# Altium PCB Proyecto_Multicapa_PCB.PcbDoc (part 2 of 2)
Units mil, origin at the board's own origin, x right, y up, seen from the top; angles counter-clockwise.
Board outline 2000 x 2600 mil, 6 copper layers (L1, L2 (GND), L3, L4, L5 (PWR), L6), stack 61.067 mil thick; 106 components, 104 nets, 402 pads, 132 vias.
Unrouted connection lines stored in the file: 69.
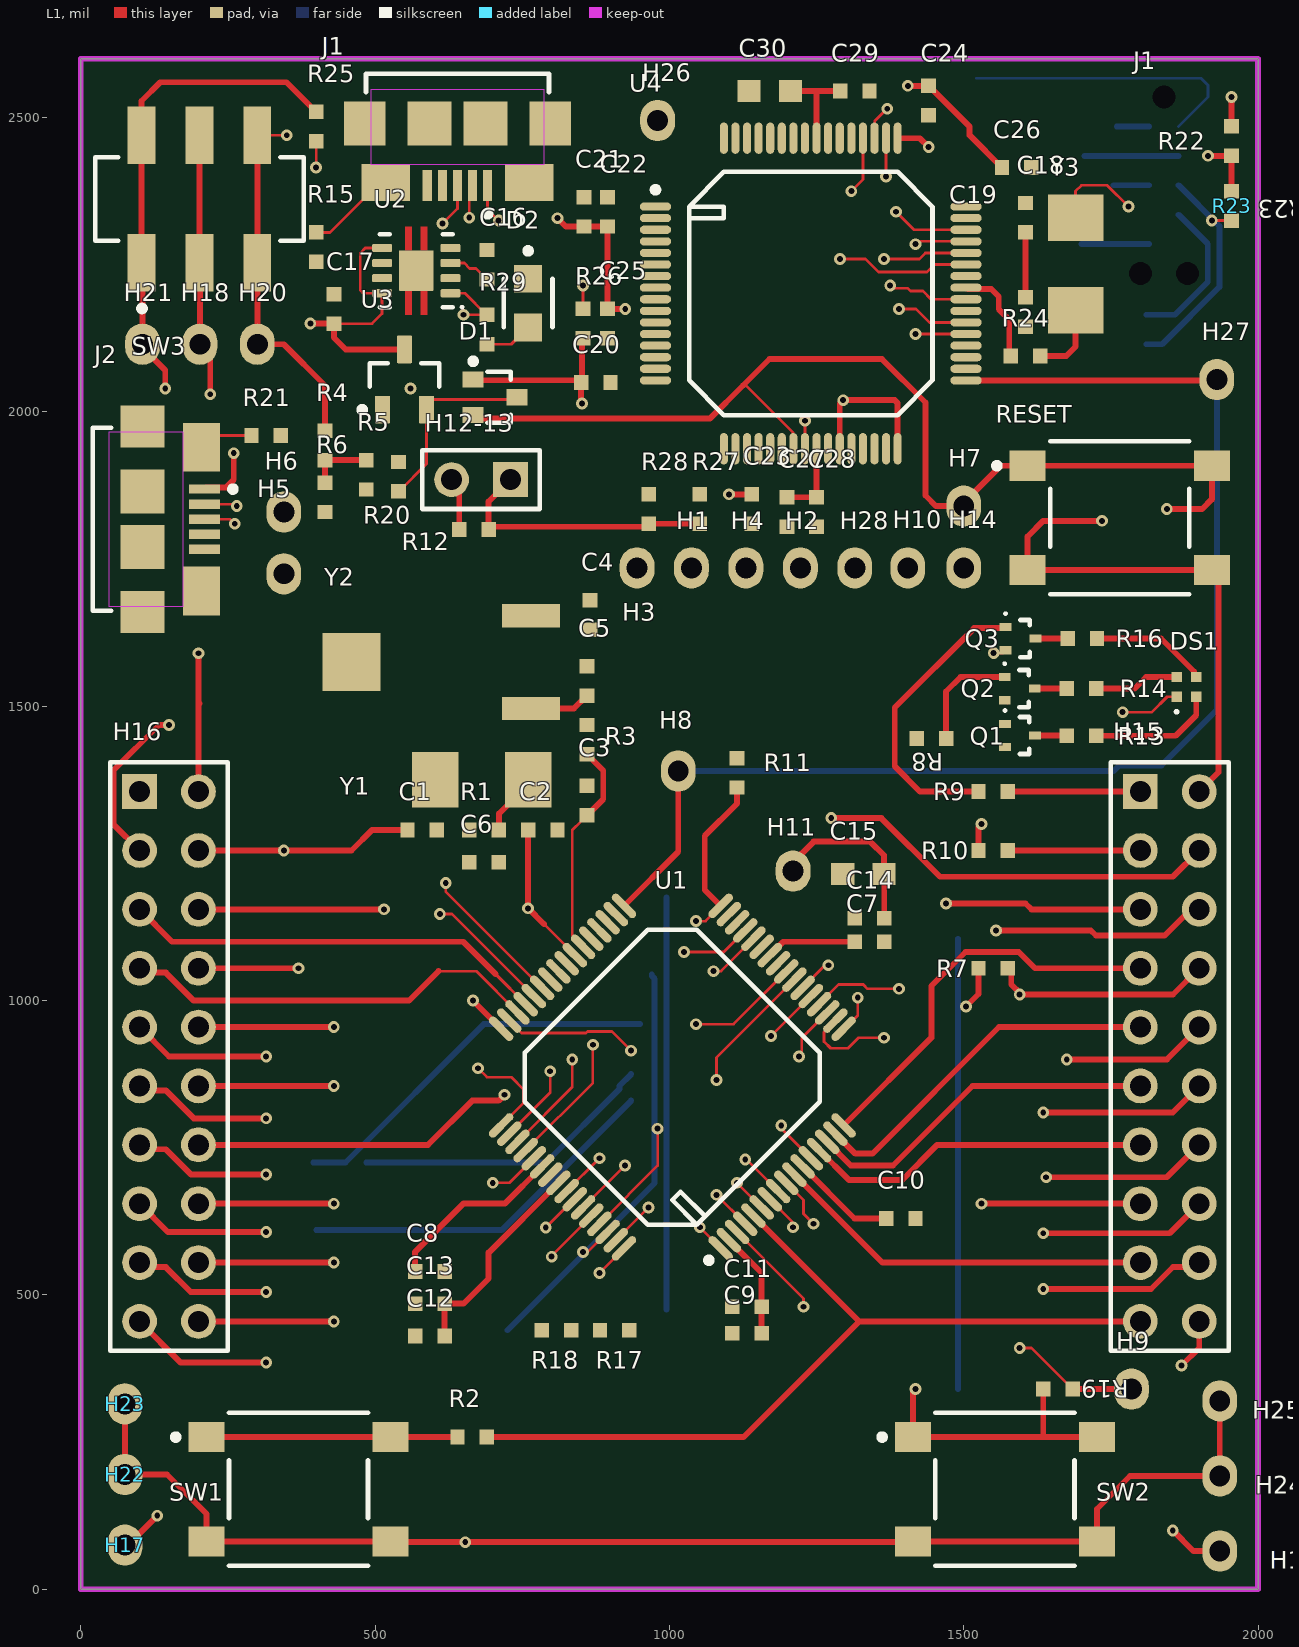
[diagram p0: L1 view]

## Via types
v1: diameter 20, hole 10, L1 to L3, 53 vias
v2: diameter 20, hole 10, L1 to L4, 49 vias
v3: diameter 20, hole 10, L3 to L6, 10 vias
v4: diameter 20, hole 10, L1 to L2 (GND), 8 vias
v5: diameter 20, hole 10, L4 to L6, 7 vias
v6: diameter 20, hole 10, L3 to L4, 3 vias
v7: diameter 20, hole 10, L1 to L6, 2 vias

## Nets (pads, with @x,y where several pads share a name; then routed paths per layer and width w, separated by ;. In a path a pad name is that pad's centre, name@x,y a point inside that pad or via, vN(x,y) a via of type N, cw(c..) or ccw(c..) an arc to the next point about the centre after c; other vN are vias at no path point) (continued)
+USB_VBUS: H20.1 J1.1@691.18,2384.68 R4.2 SW3.3 SW3.6 | length 1154.7
  L1 w4.66: SW3.6 v1(350,2470) ; J1.1@691.18,2384.68 691.18,2343.82 v1(710,2325)
  L1 w10: SW3.6 SW3.3 H20.1 345,2115 415,2045 R4.2
  L3 w10: v1(350,2470) 400,2520 515,2520 v1(710,2325)
+VBUS: C17.1 DS1.1 H16.11 H17.1 H18.1 SW3.2 SW3.5 U2.5 U2.8 U3.3 | length 6586.4
  L1 w4.66: C17.1 495,2150 511.93,2166.93 U2.8 480,2201.61 475,2206.61 475,2270.12 483.27,2278.39 U2.5 ; v1(1770,1490) 1819.47,1490 1845.69,1516.22 DS1.1
  L1 w10: H17.1 80,75 v1(130,125) ; H16.11 200,1506.57 ; v2(200,1590) 200,1506.57 ; 201.57,1505 200,1506.57 ; SW3.5 SW3.2 202.5,2252.54 H18.1 198.8,2111.3 220,2090.09 v2(220,2030) ; v2(390,2150) C17.1 430,2126.3 450.11,2106.18 U3.3
  L3 w10: v1(130,125) 1705,125 1715,135 1715,1435 v1(1770,1490)
  L4 w10: v1(130,125) 160,155 160,320 83.53,396.47 75.76,396.47 41.47,430.76 41.47,1431.47 v2(200,1590) 200,2021.2 208.8,2030 v2(220,2030) 303.24,2030 398.24,2125 398.24,2148.24 400,2150
DEBUG_PC0/TCK/SWCLK: H3.1 U1.52 | length 1067.2
  L1 w4.66: U1.52 870,860.27 v2(870,925)
  L4 w10: v2(870,925) 870,1654.53 945,1729.53 H3.1
DEBUG_PC1/TMS/SWDIO: H1.1 U1.51 | length 1236.3
  L1 w4.66: U1.51 835,853.11 v2(835,900)
  L4 w10: v2(835,900) 835,1693.44 926.56,1785 992.97,1785 1037.5,1740.47 H1.1
DEBUG_PC2/TDI: H2.1 U1.50 | length 1260.8
  L1 w4.66: U1.50 797.48,843.43 v2(797.48,880)
  L4 w10: v2(797.48,880) 832.48,845 875,845 910,880 910,1030 1222.5,1342.5 H2.1
DEBUG_PC3/TDO/SWO: H4.1 U1.49 | length 1235.2
  L1 w4.66: v1(675,885) 690,870 731.3,870 752.05,849.25 752.05,825.84 U1.49
  L3 w10: v1(675,885) 641.5,918.5 641.5,1136.5 1130,1625 H4.1
GND: C1.1 C2.1 C18.1 C19.1 D2.1 H15.11 H16.12 H22.1 H23.1 H24.1 H25.1 J1.2@1815.04,2435 J1.5 J1.9@1865.04,2435 J2.5 Q1.2 Q2.2 Q3.2 R6.1 R15.1 R21.1 RESET.3 RESET.4 SW1.3 SW1.4 SW2.3 SW2.4 U1.3 U1.12 U1.27 U1.39 U1.55 U2.4 U2.9 U3.1 U4.3 U4.12 U4.27 U4.32 U4.34 U4.35 U4.39 U4.55 | length 4703.4
  L1 w4.66: 786.76,1130 U1.39 ; U1.3 1227.88,494.01 v4(1227.88,480) ; v4(1190,787.88) 1190,782.44 U1.12 ; v4(1550.86,1590.69) 1566.38,1590.69 Q3.2 ; Q2.2 Q2.2@1574.19,1505.64
  L1 w10: H23.1 H22.1 146.57,195 213.5,128.07 SW1.3 SW1.4 527.91,80 v4(653.11,80) 1412.09,80 SW2.3 SW2.4 1726.5,136.5 1782.5,192.5 H24.1 H25.1 ; H16.12 v4(345,1255) 460,1255 495,1290 C1.1 ; R6.1 R6.1@417.6,1827.4 ; C2.1 v4(760,1156.76) 786.76,1130 ; U4.27 1289.37,2014.14 v4(1295.23,2020) 1382.8,2020 1387.8,2015 U4.32 ; C19.1 C18.1 ; v4(1735,1815) 1635,1815 1608.5,1788.5 RESET.3 RESET.4 1932.86,1720.06 1932.86,1387.86 H15.11
  L6 w10: 1700,2285 J1.5@1815.04,2285 ; 1705,2435 1815.04,2435 J1.9@1865.04,2435
NetC1_0: R1.2 Y1.1 | length 105.7
  L1 w10: R1.2 710.47,1290.47 710.47,1317.6 760,1367.13 Y1.1
NetC2_0: U1.40 Y1.2
NetC3_1: C3.1 D1.2 H7.1 H15.15 R3.1 RESET.1 RESET.2 U1.38 U4.23 | length 3429.5
  L1 w4.66: U1.38 853.28,1091.98 835,1110.26 835,1289.61 849.73,1304.34 849.73,1305.13 859.61,1315 C3.1 C3.1@860.39,1315 ; 1125,2045 1130.25,2045 1210.16,1965.09 1210.16,1937.91 U4.23
  L1 w10: D1.2 672.35,1989.14 1069.14,1989.14 1125,2045 1170,2090 1360.88,2090 1435,2015.88 1435,1858 1453,1840 H7.1 ; R3.1 860.39,1418.22 887.6,1391.02 887.6,1342.2 C3.1@860.39,1315 ; H7.1@1500,1845.47 1563.11,1908.58 RESET.1 RESET.2 1921.5,1851.5 1905,1835 v1(1845,1835) ; v1(1675,900) 1845,900 H15.15
  L3 w10: v1(1675,900) 1675,1665 v1(1845,1835)
NetC7_0: 
NetC16_1: C16.1 U2.3 | length 73.4
  L1 w4.66: U2.3 651.79,2252.8 660.75,2243.84 671.16,2243.84 C16.1
NetC18_0: R24.2 Y3.1 | length 128.2
  L1 w10: R24.2 1674.14,2095 1690,2110.86 Y3.1
NetC19_0: U4.40 Y3.2 | length 929.6
  L1 w4.66: v2(1375,2215) 1380,2210 1405,2210 1409.45,2205.55 1430.49,2205.55 1444.66,2191.38 U4.40 ; Y3.2 1690,2375 1700,2385 1743.86,2385 v2(1780,2348.86)
  L4 w10: v2(1375,2215) 1375,2105 1400,2080 1511.14,2080 v2(1780,2348.86)
NetC20_1: C20.1 D1.1 J1.8@1865.04,2385 R26.1 U4.38 | length 1838
  L1 w4.66: v1(1390,2175) 1418.69,2175 1441.68,2152.01 U4.38
  L1 w10: D1.1 667.72,2053.78 846.22,2053.78 C20.1 ; v1(851.64,2014.14) 850,2015.78 C20.1 ; R26.1 851.64,2123.36 851.64,2051.64 C20.1
  L3 w10: v1(851.64,2014.14) 1004.14,2014.14 1165,2175 v1(1390,2175) 1750,2175 v3(1810,2115)
  L6 w10: v3(1810,2115) 1837.09,2115 1934.51,2212.42 1934.51,2315.53 J1.8@1865.04,2385
NetC21_1: C21.1 C22.1 C23.1 C24.1 C25.1 C26.1 | length 1601.7
  L1 w10: v2(810,2329.17) 824.17,2315 C21.1 C22.1 C25.1 924.67,2175 v2(925,2174.67) ; v2(1101.04,1860) C23.1 ; v2(1405,2553.98) C24.1 1440.39,2553.98 1510,2484.37 1510,2470 C26.1
  L4 w10: v2(810,2329.17) 1180.2,2329.17 v2(1405,2553.98) ; v2(925,2174.67) 925,2036.04 v2(1101.04,1860)
NetC22_0: 
NetD1_3: D1.3 R20.1 U3.2 | length 325.4
  L1 w4.66: R20.1 540.39,1865 587.4,1912.01 U3.2 587.4,2010.64 597.87,2021.11 737.41,2021.11 D1.3
NetD2_2: D2.2 R29.1 | length 81.9
  L1 w4.66: R29.1 731.34,2115 D2.2
NetDS1_2: DS1.2 R14.2 | length 144.7
  L1 w10: R14.2 1790,1530 1809.68,1549.68 DS1.2
NetDS1_3: DS1.3 R16.2 | length 198.8
  L1 w10: R16.2 1835.15,1615 1891.14,1559.01 1891.14,1553.54 DS1.3
NetDS1_4: DS1.4 R13.2 | length 215.7
  L1 w10: R13.2 1860,1450 1895,1485 DS1.4
NetH5_1: H5.1 J1.3@640,2384.68 U1.44 | length 1687.1
  L1 w4.66: v7(610,1147) 630.57,1147 U1.44 ; v2(614.64,2320) 640,2345.36 J1.3@640,2384.68
  L3 w10: H5.1 345,1730.47 560,1945.47 v2(560,2040)
  L4 w10: H5.1 345,1439.64 610,1174.64 v7(610,1147) ; v2(560,2040) 560,2265.36 v2(614.64,2320)
NetH6_1: H6.1 J1.2@665.59,2384.68 U1.43 | length 2462.2
  L1 w4.66: v7(620,1200) 620,1185.4 U1.43 ; v1@665,2335 v1(660,2330) 660,2379.09 J1.2@665.59,2384.68
  L3 w10: H6.1 345,1824.53 285.47,1765 240,1765 140,1865 140,1975 54.14,2060.86 54.14,2132.59 421.56,2500 490,2500 v1(660,2330)
  L4 w10: H6.1 345,1824.53 620,1549.53 v7(620,1200)
NetH8_1: H8.1 H27.1 U1.33 U4.33 | length 2210.9
  L1 w10: U1.33@924.43,1162.47 1015,1253.04 H8.1 ; U4.33 1928.58,2053.58 H27.1
  L6 w10: H8.1 1754.73,1390 1764.26,1399.53 1835.74,1399.53 1930,1493.79 H27.1
NetH9_1: H9.1 R11.1 R19.1 U1.32 | length 1893.2
  L1 w4.66: v1(1045,1135) 1061.21,1135 U1.32 ; v1(1595,410) 1615,410 R19.1
  L1 w10: U1.32@1085.57,1162.47 1060,1188.04 1060,1279.8 1115,1334.8 R11.1 ; R19.1 H9.1
  L3 w10: v3(995,1175) 1005,1175 v1(1045,1135) ; v3@1000,475 1065,410 v1(1595,410)
  L6 w10: v3(995,475) v3(995,1175)
NetH26_1: H26.1 U4.64
NetH28_1: H28.1 U4.24 | length 332.6
  L1 w4.66: U4.24 v1(1230.32,1985)
  L3 w10: v1(1230.32,1985) 1315,1900.32 H28.1
NetJ1_1: J1.1@1815.04,2485 R23.2 U4.51 | length 777.7
  L1 w4.66: U4.51 1348.89,2465.47 1348.89,2493.89 v1(1370,2515) ; v1(1921.5,2325) R23.2
  L3 w10: v1(1370,2515) 1730,2515 v3(1760,2485) 1760.75,2485 1920.75,2325 v1(1921.5,2325)
  L6 w10: v3(1760,2485) J1.1@1815.04,2485
NetJ1_3: J1.3@1815.04,2385 R22.2 U4.52 | length 1248.4
  L1 w4.66: v1(1309.06,2375) 1328.74,2394.68 U4.52
  L1 w10: R22.2 v1(1955,2535)
  L3 w10: v1(1309.06,2375) 1309.06,2376.3 1407.76,2475 1605,2475 1695,2385 v3(1754.73,2385) 1815,2385 1935.86,2264.14 1944.14,2264.14 1955,2275 v1(1955,2535)
  L6 w10: v3(1754.73,2385) J1.3@1815.04,2385
NetJ1_6: J1.6@517.95,2389.61 J1.7@762.05,2389.61 J1.8@797.48,2490.02 J1.9@482.52,2490.02 J1.10@592.76,2490.02 J1.11 R15.2 | length 153
  L1 w4.66: R15.2 423.5,2305 508.11,2389.61 J1.6@517.95,2389.61
NetJ1_7: J1.7@1865.04,2335 U4.49 | length 808.8
  L1 w10: U4.49 1425.39,2465 v1(1440.39,2450)
  L3 w10: v1(1440.39,2450) 1525,2450 v3(1810,2165)
  L6 w10: v3(1810,2165) 1858.8,2165 1914.51,2220.71 1914.51,2285.53 J1.7@1865.04,2335
NetJ1_10: J1.10@1865.04,2485 U4.50 | length 784.3
  L1 w4.66: v1(1368.11,2400) U4.50
  L4 w10: v1(1368.11,2400) 1504.16,2536.05 1504.16,2549.16 v5(1521.84,2566.84)
  L6 w4.66: v5(1521.84,2566.84) 1903.16,2566.84 1915,2555 1915,2534.96 J1.10@1865.04,2485
NetJ2_2: J2.2 U4.43 | length 1516.4
  L1 w4.66: J2.2 261.65,1843.35 v1(265,1840) ; v1(1290,2260) 1332.95,2260 1355.28,2237.67 1437.33,2237.67 1450.09,2250.43 U4.43
  L3 w10: v1(265,1840) 265,1875 665,2275 1275,2275 v1(1290,2260)
NetJ2_3: J2.3 U4.44 | length 1520.3
  L1 w4.66: J2.3 253.9,1817.76 v1(261.65,1810) ; v1(1364.53,2260) 1424.69,2260 1434.81,2270.12 U4.44
  L3 w10: v1(261.65,1810) 263.57,1811.91 272.27,1811.91 296.96,1836.6 296.96,1878.67 663.28,2245 1269.64,2245 1279.64,2235 1300.36,2235 1325.36,2260 v1(1364.53,2260)
NetJ2_6: J2.6 J2.7 J2.8 J2.9 J2.10 J2.11 R21.2 | length 93
  L1 w4.66: J2.7 225.61,1960 R21.2
NetQ1_1: Q1.1 R10.1 | length 226.2
  L1 w10: R10.1 1525,1295 v1(1530,1300)
  L3 w10: v1(1530,1300) 1530,1462.29 1540,1472.29 1540,1475
NetQ1_3: Q1.3 R13.1 | length 54.1
  L1 w10: Q1.3 1621.14,1450.16 1674.84,1450.16 R13.1
NetQ2_1: Q2.1 R8.1 | length 189.7
  L1 w10: R8.1 1470,1525 1494.68,1549.68 Q2.1
NetQ2_3: Q2.3 R14.1 | length 54.5
  L1 w10: Q2.3 R14.1
NetQ3_1: Q3.1 R9.1 | length 504.7
  L1 w10: R9.1 1425.86,1355 1382.8,1398.06 1382.8,1497.8 1517.68,1632.68 1569,1632.68 Q3.1
NetQ3_3: Q3.3 R16.1 | length 54.5
  L1 w10: Q3.3 R16.1
NetR1_1: R1.1 U1.41
NetR2_2: R2.2 SW1.1 SW1.2 | length 426.5
  L1 w10: SW1.1 SW1.2 R2.2
NetR4_1: R4.1 R5.1 R6.2 | length 108.2
  L1 w10: R6.2 R4.1 R5.1
NetR7_1: R7.1 R19.2 SW2.1 SW2.2 | length 1519.1
  L1 w10: v2(1418.11,340) 1413.5,335.39 SW2.1 1635,258.58 ; v2(1503.94,990) 1525,1011.06 R7.1 ; R19.2 1635,258.58 ; SW2.2 1635,258.58
  L4 w10: v2(1418.11,340) v5(1490,340) v5@1500,340 ; v5(1490,1105) 1490,1006.06 1503.94,992.13 v2(1503.94,990)
  L6 w10: v5(1490,340) v5(1490,1105)
NetR17_1: R17.1
NetR17_2: R17.2
NetR18_1: R18.1
NetR18_2: R18.2
NetR24_1: R24.1 U4.41 | length 171.3
  L1 w10: U4.41 1506.14,2208.86 1546.69,2208.86 1559.51,2196.04 1559.51,2174.67 1577.4,2156.78 1577.4,2097.6 R24.1
NetR25_2: R25.2 U4.46 | length 1226.3
  L1 w4.66: v1(399.61,2415) 400,2415.39 R25.2 ; v1(1385,2340) 1415.51,2309.49 U4.46
  L3 w10: v1(399.61,2415) 514.61,2300 1345,2300 v1(1385,2340)
NetU4_29: U4.29
NetU4_30: U4.30
NetU4_53: U4.53
PA0/U0RX_VCP_TXD: H10.1 U1.17 | length 828.8
  L1 w4.66: U1.17 1297.12,952.12 1320,975 v2(1320,1005)
  L4 w10: v2(1320,1005) 1320,1205 1405,1290 H10.1
PA0/U0RX_VCP_TXD: U4.17
PA1/U0TX_VCP_RXD: H14.1 U1.18 | length 1011.8
  L1 w4.66: U1.18 1282,965.39 1262.78,946.17 1262.78,930.24 1274.04,918.99 1303.14,918.99 1321.12,936.96 v2(1364.53,936.96)
  L4 w10: v2(1364.53,936.96) 1364.53,1179.53 1500,1315 H14.1
PA1/U0TX_VCP_RXD: U4.18
PA2: H15.20 U1.19 | length 1082
  L1 w4.66: v2(1220,905) 1225,910 1225,936.96 1225.07,936.96 U1.19
  L1 w10: v2(1870,380) 1900,410 H15.20
  L4 w4.66: 1655,415 1671.03,398.97 1851.03,398.97 v2(1870,380)
  L4 w10: v2(1220,905) 1610,515 1610,460 1655,415
PA3: H15.19 U1.20 | length 1081
  L1 w4.66: U1.20 1287.6,1027.33 1329.25,1027.33 1336.58,1020 v2(1390,1020)
  L1 w10: v2(1635,510) 1817.97,510 1855.47,547.5 1892.5,547.5 H15.19
  L4 w10: v2(1390,1020) 1390,1009.73 1675,724.73 1675,550 v2(1635,510)
PA4: H15.18 U1.21 | length 983.1
  L1 w4.66: v2(1172.44,940) U1.21
  L1 w10: v2(1635,604.76) 1849.76,604.76 H15.18
  L4 w10: v2(1172.44,940) 1299.76,940 v2(1635,604.76)
PA5: H16.8 U1.22 | length 1437.1
  L1 w4.66: U1.22 1264.6,1060 v2(1270,1060)
  L1 w10: H16.8 148.08,606.92 v2(315,606.92)
  L4 w10: v2(315,606.92) 396.92,606.92 v5(400,610) ; v5(935,830) 1000,830 1139.04,969.04 1179.04,969.04 v2(1270,1060)
  L6 w10: v5(400,610) 715,610 v5(935,830)
PA6: H16.9 U1.23 | length 1427.9
  L1 w4.66: v1(1080,865) 1080,903.24 U1.23
  L1 w10: H16.9 107.72,547.28 144.53,547.28 186.8,505 v1(315,505)
  L3 w10: v1(315,505) 368.28,558.28 368.28,628.63 464.64,725 v3(485,725) ; v3(935,875) 960,875 970,865 v1(1080,865)
  L6 w10: v3(485,725) 790.36,725 915,849.64 915,855 v3(935,875)
PA7: H16.10 U1.24 | length 1575.8
  L1 w4.66: v2(1045,960) 1108.92,960 U1.24
  L1 w10: H16.10 170,385 v1(315,385)
  L3 w10: v1(315,385) 315,469.64 290,494.64 290,620 v3(395,725)
  L4 w10: v5(950,960) v2(1045,960)
  L6 w10: v3(395,725) 449.64,725 684.64,960 v5(950,960)
PB0: H16.3 U1.45 | length 722.6
  L1 w4.66: 705,1044.73 U1.45
  L1 w10: H16.3 155,1100 649.73,1100 705,1044.73
PB1: H16.4 U1.46 | length 714.4
  L1 w4.66: 607.8,1050 671.89,1050 U1.46
  L1 w10: H16.4 107.5,1047.5 144.53,1047.5 192.03,1000 557.8,1000 607.8,1050
PB2: H15.12 U1.47 | length 1521
  L1 w4.66: U1.47 749.05,945 858.42,945 860.75,947.33 902.67,947.33 v2(935,915)
  L1 w10: v2(1275,1310) 1360,1310 1459.69,1210.31 1855.31,1210.31 H15.12
  L4 w10: v2(935,915) 1055,915 1275,1135 v2(1275,1310)
PB3: H15.3 U1.48 | length 1273.6
  L1 w10: v1(666.5,1000) 666.5,999.71 U1.48 ; v1(1470,1165) 1605,1165 1615,1155 H15.3
  L3 w10: v1(666.5,1000) 1274.92,1000 1344.64,1069.73 1374.73,1069.73 v1(1470,1165)
PB4: H16.7 U1.58 | length 817.4
  L1 w4.66: v1(790,614.54) 838.06,662.6 U1.58
  L1 w10: H16.7 107.5,747.5 144.53,747.5 187.67,704.36 v2(315,704.36)
  L3 w10: v6(684.14,629.14) 698.74,614.54 v1(790,614.54)
  L4 w10: v2(315,704.36) 319.36,700 613.28,700 v6(684.14,629.14)
PB5: H16.2 U1.57 | length 1447.2
  L1 w4.66: U1.57 v2(881.12,732.2)
  L1 w10: H16.2 55.47,1299.53 55.47,1390.74 132.95,1468.22 v1(150,1468.22)
  L3 w10: v1(150,1468.22) 195.45,1422.78 215,1422.78 338.21,1299.56 338.21,1211.43 479.64,1070 v6(530,1070)
  L4 w10: v6(530,1070) 543.31,1070 v2(881.12,732.2)
PB6: H15.17 U1.1 | length 1027.3
  L1 w4.66: v1@1051.67,614.54 U1.1
  L1 w10: v1@1051.67,614.54 v1(1051.67,615) ; v1(1640,700) 1845,700 H15.17
  L3 w10: v1(1051.67,615) 1136.67,530 1470,530 v1(1640,700)
PB7: H15.16 U1.4 | length 1040.6
  L1 w4.66: v1(1080,670) U1.4@1128.88,621.12
  L1 w10: U1.4 U1.4@1128.88,621.12 ; v1(1635,810) 1855,810 H15.16
  L3 w10: v1(1080,670) 1170,580 1300,580 1530,810 v1(1635,810)
PC4: H15.4 U1.16 | length 686.8
  L1 w10: U1.16@1297.47,789.43 1445,936.96 1445,1024.64 1502.95,1082.6 1593.42,1082.6 1621.02,1055 H15.4
PC5: H15.5 U1.15 | length 621.1
  L1 w10: U1.15 1315.95,740 1345,740 1560,955 H15.5
PC6: H15.6 U1.14 | length 604.4
  L1 w10: U1.14 1308.11,720 1380,720 1515,855 H15.6
PC7: H15.7 U1.13 | length 591.9
  L1 w10: U1.13 1305.27,695 1395,695 1455,755 H15.7
PD0: H16.13 U1.61 | length 1153.2
  L1 w4.66: U1.61 980,719.73 v2(980,782.44)
  L1 w10: H16.13 v2(515,1155)
  L4 w10: v2(515,1155) 772.48,897.52 772.48,869.64 859.69,782.44 v2(980,782.44)
PD1: H16.14 U1.62 | length 908.6
  L1 w4.66: v2(853.28,573.11) 861.22,573.11 U1.62
  L1 w10: H16.14 v2(370,1055)
  L4 w10: v2(370,1055) 371.39,1055 v2(853.28,573.11)
PD2: H16.15 U1.63 | length 988.1
  L1 w4.66: U1.63 v1(964.63,648.68) v1@965,648.68
  L1 w10: H16.15 v1(430,955)
  L3 w10: v1(430,955) 560.78,824.22 560.78,794.31 706.4,648.68 v1(964.63,648.68)
PD3: H16.16 U1.64 | length 886.4
  L1 w4.66: v1(881.12,537.32) U1.64
  L1 w10: H16.16 v1(430,855)
  L3 w10: v1(430,855) 430,830 722.68,537.32 v1(881.12,537.32)
PD6: H15.8 U1.53 | length 1280.4
  L1 w4.66: v1(700,690.44) 728,690.44 U1.53
  L1 w10: v1(1530,655) H15.8
  L3 w10: v1(700,690.44) 715.44,675 1031.67,675 1146.67,560 1435,560 v1(1530,655)
PD7: H15.9 R5.2 U1.10 | length 649.5
  L1 w10: U1.10 1361.76,555 H15.9
PE0: H15.13 U1.9 | length 1082.6
  L1 w4.66: U1.9 1227.88,661.04 1227.88,637.96 v1(1245,620.84)
  L1 w10: v1(1555,1119.16) 1715.84,1119.16 1724.53,1110.47 1841.31,1110.47 1878.34,1147.5 1892.5,1147.5 H15.13
  L3 w10: v1(1245,620.84) 1555,930.84 v1(1555,1119.16)
PE1: H16.17 U1.8 | length 1110.3
  L1 w4.66: v2@1125,730 v2(1128.88,730) 1131.08,730 U1.8
  L1 w10: H16.17 590,755 665,830 710,830 v2(720,840)
  L4 w10: v2(720,840) 852.8,707.2 1012.2,707.2 1035,730 v2(1128.88,730)
PE2: H16.18 U1.7 | length 1189.9
  L1 w4.66: U1.7 1210,623.24 v2(1210,615)
  L1 w10: H16.18 v1(430,655)
  L3 w10: v1(430,655) 560,655 720,495 874.16,495 894.16,515 v6(1045,515)
  L4 w10: v6(1045,515) 1070,515 1170,615 v2(1210,615)
PE3: H16.19 U1.6 | length 1090.3
  L1 w4.66: v2(1115,690.44) U1.6
  L1 w10: H16.19 v2(430,555)
  L4 w10: v2(430,555) 700,555 765,490 917.17,490 v2@1120.22,693.06
PE4: H16.5 U1.59 | length 1128.9
  L1 w4.66: U1.59 v1(924.6,720) v1@925,720
  L1 w10: H16.5 150,905 v1(315,905)
  L3 w10: v1(315,905) 315,940 370,995 466.5,995 754.3,707.2 891.47,707.2 904.27,720 v1(924.6,720)
PE5: H16.6 U1.60 | length 917.7
  L1 w4.66: v2(800,565) 800,566.28 850.94,617.22 850.94,618.5 U1.60
  L1 w10: H16.6 107.5,847.5 144.53,847.5 192.03,800 v2(315,800)
  L4 w10: v2(315,800) 559.87,800 794.87,565 v2(800,565)
PF0: H15.14 R7.2 U1.28 | length 1250
  L1 w4.66: v1(1075,1050) 1087.56,1050 U1.28
  L1 w10: R7.2 1580.78,1049.22 1580.78,1027.4 1595,1013.18 v1(1595,1010.47) 1855.47,1010.47 H15.14
  L3 w10: v1(1075,1050) 1185,1050 1340.86,1205.86 1579.14,1205.86 1610,1175 1610,1025.47 v1(1595,1010.47)
PF1: H16.20 R8.2 U1.29 | length 1431.3
  L1 w4.66: v2(1025,1082.6) 1092.32,1082.6 U1.29
  L1 w10: H16.20 v1(430,455)
  L3 w10: v1(430,455) 550,455 565,440 v3(725,440)
  L4 w10: v5(970,1044.73) 1005.96,1080.69 1023.09,1080.69 v2(1025,1082.6)
  L6 w10: v3(725,440) 975,690 975,1037.02 970,1042.02 v5(970,1044.73)
PF2: H15.1 R9.2 U1.30 | length 225
  L1 w10: R9.2 H15.1
PF3: H15.2 R10.2 U1.31 | length 225
  L1 w10: R10.2 H15.2
PF4: H15.10 R2.1 U1.5 | length 1445.6
  L1 w10: R2.1 1126.15,258.58 1322.56,455 ; U1.5 1322.56,455 ; H15.10 1322.56,455
U135: C4.1 U1.35
U136: C5.1 U1.36 Y2.2 | length 103.9
  L1 w10: Y2.2 837.76,1496.26 859.61,1518.11 C5.1
U143: U1.34 Y2.1
VCC: R20.2
VDD: C6.1 C7.1 C8.1 C9.1 C10.1 C11.1 H12-13.1 R3.2 R11.2 R12.1 R27.1 R28.1 U1.2 U1.11 U1.26 U1.37 U1.42 U1.54 | length 1292.2
  L1 w10: C8.1 568.11,573.11 650,655 720.4,655 U1.54 ; H12-13.1 693,1848 R12.1 698,1805 960,1805 R28.1 R27.1 ; U1.2 1156.73,537.32 C11.1 C9.1 ; U1.26 1193.24,1100 C7.1 C7.1@1310,1105 ; U1.11 1314.6,630 C10.1
VDD2: U4.2 U4.11 U4.26 U4.42 U4.54
VDDC: C12.1 C13.1 C14.1 C15.1 H11.1 U1.25 U1.56 | length 665.1
  L1 w10: C12.1 C13.1 618.11,485.39 650.39,485.39 693,528 693,571.92 U1.56 ; H11.1 1224.6,1234.6 1224.6,1249.6 1245,1270 1341.36,1270 1364.53,1246.83 C15.1 C15.1@1365,1214.53 ; C14.1 C15.1@1365,1214.53 ; C15.1@1365,1219.53 C15.1@1365,1214.53
VDDC2: C27.1 C28.1 C29.1 C30.1 U4.25 U4.56 | length 297
  L1 w10: C27.1 C28.1 U4.25 ; C30.1 1250,2545 ; U4.56 1250,2545 ; C29.1 1250,2545
pads on no net: C1.2 C2.2 C3.2 C4.2 C5.2 C6.2 C7.2 C8.2 C9.2 C10.2 C11.2 C12.2 C13.2 C14.2 C15.2 C16.2 C17.2 C18.2 C19.2 C20.2 C21.2 C22.2 C23.2 C24.2 C25.2 C26.2 C27.2 C28.2 C29.2 C30.2 J1.0 J1.4 J1.6@1865.04,2285 J2.4 R27.2 R28.2 U2.2 U2.6 U2.7 U4.1 U4.4 U4.5 U4.6 U4.7 U4.8 U4.9 U4.10 U4.13 U4.14 U4.15 U4.16 U4.19 U4.20 U4.21 U4.22 U4.28 U4.31 U4.36 U4.47 U4.48 U4.57 U4.58 U4.59 U4.60 U4.61 U4.62 U4.63 Y2.0

## Polygon pours and split planes (outlines as drawn)
no net on L2 (GND) (split plane): 1979.9,20.1 20.1,20.1 20.1,2579.9 1979.9,2579.9
no net on L5 (PWR) (split plane): 1979.9,20.1 20.1,20.1 20.1,2579.9 1979.9,2579.9

## Keep-outs
Keep-Out Layer:
  the board outline again, w10